# EAGLE board lora_breakout_36_pin_v2 (EAGLE 9.7.0)
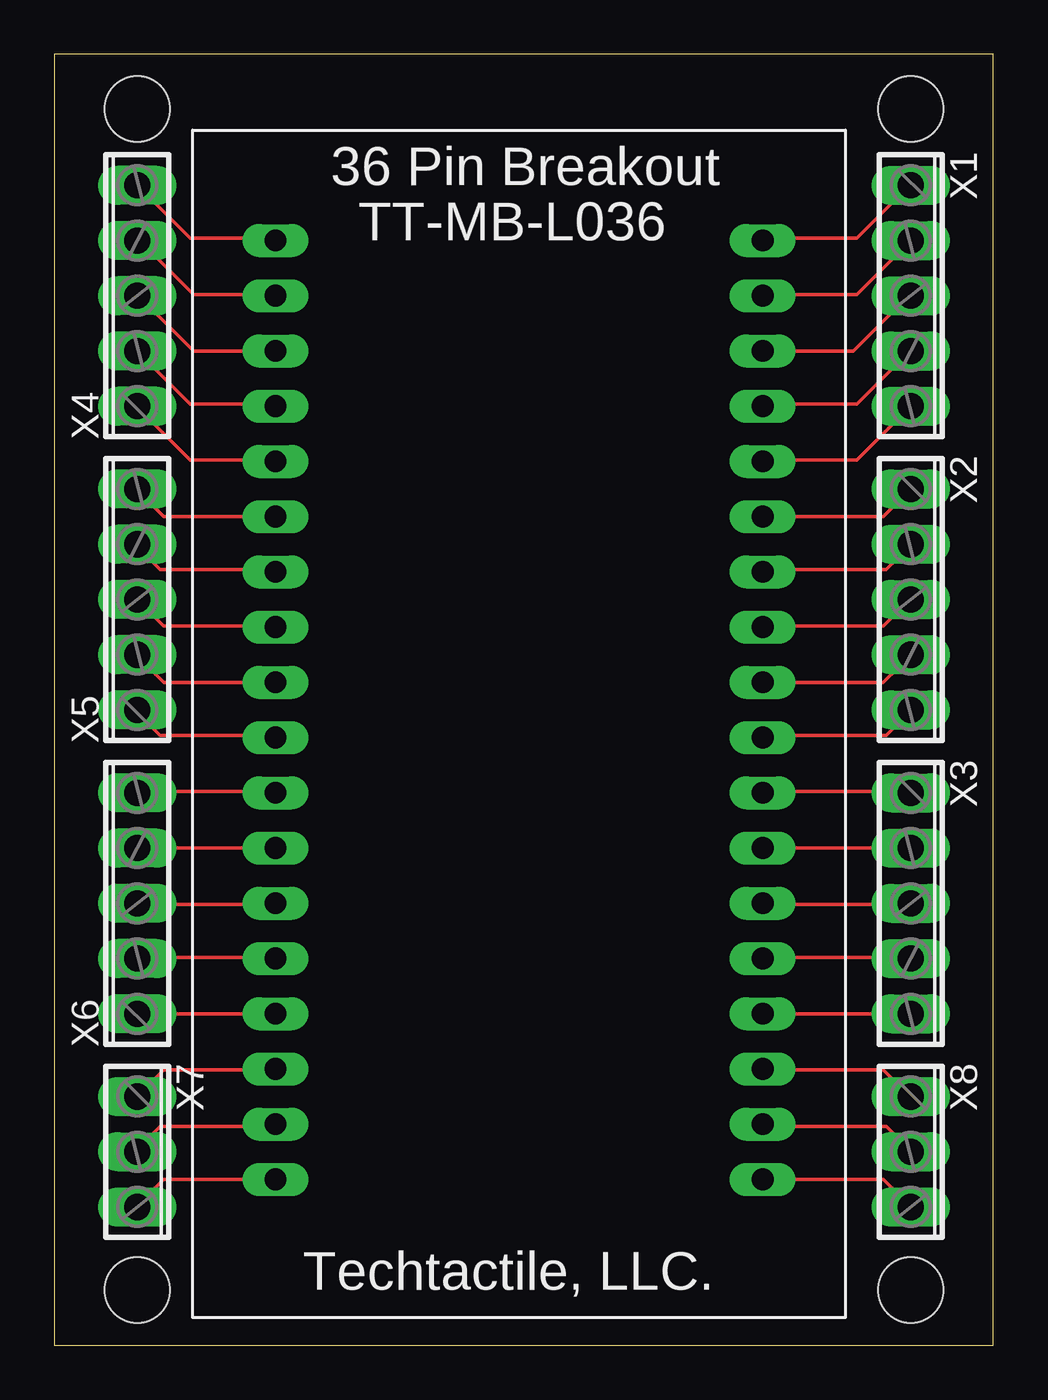
[diagram p0: board, top side]

Size 43.16 x 59.36 mm. Coordinates in mm from the lower left corner, seen from the top.
Outline: 0,0 43.16,0 43.16,59.36 0,59.36 0,0
Copper layers (1*16): Top 0.035mm / dielectric 1.5mm / Bottom 0.035mm
Design rules "default": minimum track width 6mil, minimum drill 0.35mm, track to track 6mil, track to pad 6mil, pad to pad 6mil, via to via 6mil, smd to smd 6mil, copper to edge 40mil, drill to drill 6mil, minimum pad ring 10mil, minimum via ring 8mil, stop-mask expansion 4mil, vias tented up to drill 0mil, thermal gap 10mil
Holes 3 mm at 3.81,2.54 39.37,2.54 39.37,56.84 3.81,56.84

## Footprints (pad centres in the part's own frame; a part is rotated, then mirrored left to right if it is on the bottom)
HELTECLORA = drill 1 long: 1 12.24,22.86; 2 12.24,20.32; 3 12.24,17.78; 4 12.24,15.24; 5 12.24,12.7; 6 12.24,10.16; 7 12.24,7.62; 8 12.24,5.08; 9 12.24,2.54; 10 12.24,0; 11 12.24,-2.54; 12 12.24,-5.08; 13 12.24,-7.62; 14 12.24,-10.16; 15 12.24,-12.7; 16 12.24,-15.24; 17 12.24,-17.78; 18 12.24,-20.32; 19 -10.16,-20.32; 20 -10.16,-17.78; 21 -10.16,-15.24; 22 -10.16,-12.7; 23 -10.16,-10.16; 24 -10.16,-7.62; 25 -10.16,-5.08; 26 -10.16,-2.54; 27 -10.16,0; 28 -10.16,2.54; 29 -10.16,5.08; 30 -10.16,7.62; 31 -10.16,10.16; 32 -10.16,12.7; 33 -10.16,15.24; 34 -10.16,17.78; 35 -10.16,20.32; 36 -10.16,22.86
5POL254 = drill 1.2 long: 1 -5.08,0; 2 -2.54,0; 3 0,0; 4 2.54,0; 5 5.08,0
3POL254 = drill 1.2 long: 1 -2.54,0; 2 0,0; 3 2.54,0

## Placement (x,y rotation side)
U$1  HELTECLORA  [HELTECLORA]  20.32,27.94 0 top
X1  [5POL254]  39.37,48.26 270 top
X2  [5POL254]  39.37,34.29 270 top
X3  [5POL254]  39.37,20.32 270 top
X4  [5POL254]  3.81,48.26 90 top
X5  [5POL254]  3.81,34.29 90 top
X6  [5POL254]  3.81,20.32 90 top
X7  [3POL254]  3.81,8.89 270 top
X8  [3POL254]  39.37,8.89 270 top

## Library data of the parts
U$1 = NODEMCU
X1-X8 = con-phoenix-254; OC_FARNELL: unknown; OC_NEWARK: unknown

## Nets
P1: U$1.1 X1.1
P2: U$1.2 X1.2
P3: U$1.3 X1.3
P4: U$1.4 X1.4
P5: U$1.5 X1.5
P6: U$1.6 X2.1
P7: U$1.7 X2.2
P8: U$1.8 X2.3
P9: U$1.9 X2.4
P10: U$1.10 X2.5
P11: U$1.11 X3.1
P12: U$1.12 X3.2
P13: U$1.13 X3.3
P14: U$1.14 X3.4
P15: U$1.15 X3.5
P16: U$1.16 X8.1
P17: U$1.17 X8.2
P18: U$1.18 X8.3
P19: U$1.19 X7.3
P20: U$1.20 X7.2
P21: U$1.21 X7.1
P22: U$1.22 X6.1
P23: U$1.23 X6.2
P24: U$1.24 X6.3
P25: U$1.25 X6.4
P26: U$1.26 X6.5
P27: U$1.27 X5.1
P28: U$1.28 X5.2
P29: U$1.29 X5.3
P30: U$1.30 X5.4
P31: U$1.31 X5.5
P32: U$1.32 X4.1
P33: U$1.33 X4.2
P34: U$1.34 X4.3
P35: U$1.35 X4.4
P36: U$1.36 X4.5

## Tracks (layer width: path | path; a pad name or v marks a point on that pad's centre or on a via)
P1
  Top 0.152: U$1.1 32.61,50.9 36.88,50.9 39.32,53.34 X1.1
P2
  Top 0.152: X1.2 36.88,48.31 32.61,48.31 U$1.2
P3
  Top 0.152: U$1.3 36.73,45.72 39.32,48.31 X1.3
P4
  Top 0.152: U$1.4 32.61,43.28 36.88,43.28 39.32,45.72 X1.4
P5
  Top 0.152: X1.5 36.88,40.69 32.61,40.69 U$1.5
P6
  Top 0.152: U$1.6 38.1,38.1 X2.1
P7
  Top 0.152: U$1.7 32.61,35.66 38.25,35.66 39.32,36.73 X2.2
P8
  Top 0.152: U$1.8 32.61,33.07 38.1,33.07 39.32,34.29 X2.3
P9
  Top 0.152: U$1.9 38.1,30.48 X2.4
P10
  Top 0.152: U$1.10 32.61,28.04 38.25,28.04 39.32,29.11 X2.5
P11
  Top 0.152: U$1.11 32.61,25.45 39.32,25.45 X3.1
P12
  Top 0.152: X3.2 U$1.12
P13
  Top 0.152: U$1.13 32.61,20.27 39.32,20.27 X3.3
P14
  Top 0.152: U$1.14 32.61,17.83 39.32,17.83 X3.4
P15
  Top 0.152: X3.5 U$1.15
P16
  Top 0.152: U$1.16 32.61,12.65 38.1,12.65 39.32,11.43 X8.1
P17
  Top 0.152: U$1.17 32.61,10.06 38.25,10.06 39.32,8.99 X8.2
P18
  Top 0.152: U$1.18 38.1,7.62 X8.3
P19
  Top 0.152: U$1.19 5.03,7.62 3.81,6.4 X7.3
P20
  Top 0.152: U$1.20 10.06,10.06 4.88,10.06 3.81,8.99 X7.2
P21
  Top 0.152: X7.1 5.03,12.65 10.06,12.65 U$1.21
P22
  Top 0.152: X6.1 U$1.22
P23
  Top 0.152: U$1.23 10.06,17.83 3.81,17.83 X6.2
P24
  Top 0.152: U$1.24 10.06,20.27 3.81,20.27 X6.3
P25
  Top 0.152: X6.4 U$1.25
P26
  Top 0.152: U$1.26 10.06,25.45 3.81,25.45 X6.5
P27
  Top 0.152: U$1.27 10.06,28.04 4.88,28.04 3.81,29.11 X5.1
P28
  Top 0.152: U$1.28 5.03,30.48 3.81,31.7 X5.2
P29
  Top 0.152: X5.3 5.03,33.07 10.06,33.07 U$1.29
P30
  Top 0.152: U$1.30 10.06,35.66 4.88,35.66 3.81,36.73 X5.4
P31
  Top 0.152: U$1.31 5.03,38.1 3.81,39.32 X5.5
P32
  Top 0.152: U$1.32 10.06,40.69 6.25,40.69 3.81,43.13 X4.1
P33
  Top 0.152: X4.2 6.25,43.28 10.06,43.28 U$1.33
P34
  Top 0.152: U$1.34 6.4,45.72 3.81,48.31 X4.3
P35
  Top 0.152: U$1.35 10.06,48.31 6.4,48.31 3.81,50.9 X4.4
P36
  Top 0.152: X4.5 6.25,50.9 10.06,50.9 U$1.36

## Text on the board
tNames: 36 Pin Breakout | TT-MB-L036 | Techtactile, LLC.
bNames: 36 Pin Breakout | TT-MB-L036 | zeobi.com | Techtactile, LLC.